# EAGLE board CommsTestBoardV2 (EAGLE 9.6.2)

Size 100 x 106.67 mm. Coordinates in mm from the lower left corner, seen from the top.
Outline: 0,0 100,0 100,106.67 0,106.67 0,0
Copper layers (1*16): Top 0.035mm / dielectric 1.5mm / Bottom 0.035mm
Design rules "default": minimum track width 6mil, minimum drill 0.35mm, track to track 6mil, track to pad 6mil, pad to pad 6mil, via to via 6mil, smd to smd 6mil, copper to edge 40mil, drill to drill 6mil, minimum pad ring 10mil, minimum via ring 8mil, stop-mask expansion 4mil, vias tented up to drill 0mil, thermal gap 10mil

## Footprints (pad centres in the part's own frame; a part is rotated, then mirrored left to right if it is on the bottom)
1985205 = drill 1 pad 1.5: 1 -2.75,-1.3; 2 0.75,3.7; 3 4.25,-1.3
LED-5MM = drill 0.813 octagon: A -1.27,0; K 1.27,0
3RP/1610N = drill 1.2 pad 2.184: 1 -5,0; 2 0,0; 3 5,0
OS102011MA1QN1 = drill 0.8 pad 1.3: 1 -2,0; 2 0,0; 3 2,0 | drill 1.5 pad 2.25: 4 -4.1,0; 5 4.1,0
PTS636SL50LFS = drill 1.2 pad 1.8: 1 0,0; 2 6.4,0
XBEE_PRO_S3B = drill 0.8 pad 1.4 square: 1 -11,8.75 | drill 0.8 pad 1.4: 2 -11,6.75; 3 -11,4.75; 4 -11,2.75; 5 -11,0.75; 6 -11,-1.25; 7 -11,-3.25; 8 -11,-5.25; 9 -11,-7.25; 10 -11,-9.25; 11 11,-9.25; 12 11,-7.25; 13 11,-5.25; 14 11,-3.25; 15 11,-1.25; 16 11,0.75; 17 11,2.75; 18 11,4.75; 19 11,6.75; 20 11,8.75
TEENSY_4.0_SIMPLE = drill 0.965: 0/RX -13.97,-7.62; 1/TX -11.43,-7.62; 2 -8.89,-7.62; 3/CANTX -6.35,-7.62; 3V3_LO -11.43,7.62; 4/CANRX -3.81,-7.62; 5 -1.27,-7.62; 6 1.27,-7.62; 7 3.81,-7.62; 8 6.35,-7.62; 9/CS 8.89,-7.62; 10/CS 11.43,-7.62; 11/MOSI 13.97,-7.62; 12/MISO 16.51,-7.62; 13/SCK 16.51,7.62; 14/A0 13.97,7.62; 15/A1 11.43,7.62; 16/A2 8.89,7.62; 17/A3 6.35,7.62; 18/A4/SDA 3.81,7.62; 19/A5/SCL 1.27,7.62; 20/A6 -1.27,7.62; 21/A7 -3.81,7.62; 22/A8 -6.35,7.62; 23/A9 -8.89,7.62; GND -16.51,-7.62; GND2 -13.97,7.62; VIN -16.51,7.62
TEENSY_4.1_SIMPLE = drill 0.965: 0/RX -25.4,-7.62; 1/TX -22.86,-7.62; 2 -20.32,-7.62; 3/CANTX -17.78,-7.62; 3V3_2 7.62,-7.62; 3V3_LO -22.86,7.62; 4/CANRX -15.24,-7.62; 5 -12.7,-7.62; 6 -10.16,-7.62; 7 -7.62,-7.62; 8 -5.08,-7.62; 9/CS -2.54,-7.62; 10/CS 0,-7.62; 11/MOSI 2.54,-7.62; 12/MISO 5.08,-7.62; 13/SCK 5.08,7.62; 14/A0 2.54,7.62; 15/A1 0,7.62; 16/A2 -2.54,7.62; 17/A3 -5.08,7.62; 18/A4/SDA -7.62,7.62; 19/A5/SCL -10.16,7.62; 20/A6 -12.7,7.62; 21/A7 -15.24,7.62; 22/A8 -17.78,7.62; 23/A9 -20.32,7.62; 24/A10 10.16,-7.62; 25/A11 12.7,-7.62; 26/A12 15.24,-7.62; 27/A13 17.78,-7.62; 28 20.32,-7.62; 29 22.86,-7.62; 30 25.4,-7.62; 31 27.94,-7.62; 32 30.48,-7.62; 33 30.48,7.62; 34 27.94,7.62; 35 25.4,7.62; 36 22.86,7.62; 37 20.32,7.62; 38/A14 17.78,7.62; 39/A15 15.24,7.62; 40/A16 12.7,7.62; 41/A17 10.16,7.62; GND -27.94,-7.62; GND2 -25.4,7.62; GND3 7.62,7.62; VIN -27.94,7.62
OLED_SSD1306 = drill 1.016 long: GND 0,-3.81; SCL 0,1.27; SDA 0,3.81; VCC 0,-1.27
43045-0400 = drill 1.02 square: P$1 1.5,4.32 | drill 1.02: P$2 -1.5,4.32; P$3 1.5,7.32; P$4 -1.5,7.32 | hole 3: 0,0
43650-0300 = drill 1.02 square: P$1 3,4.32 | drill 1.02: P$2 0,4.32; P$3 -3,4.32 | hole 3: 0,0
43045-0600 = drill 1.02 square: P$1 3,4.32 | drill 1.02: P$2 0,4.32; P$3 -3,4.32; P$4 3,7.32; P$5 0,7.32; P$6 -3,7.32 | hole 3: 0,0

## Placement (x,y rotation side)
J1  1985205  [1985205]  -58.42,83.82 0 top  (outside the outline)
J2  1985205  [1985205]  -73.66,83.82 0 top  (outside the outline)
LED1  [LED-5MM]  -46.99,99.06 0 top  (outside the outline)
LED2  [LED-5MM]  -59.69,99.06 0 top  (outside the outline)
R1  [3RP/1610N]  -21.59,49.53 0 top  (outside the outline)
R2  [3RP/1610N]  -39.37,49.53 0 top  (outside the outline)
S1  SWITCH_SLIDE_OS102011MS2QN1  [OS102011MA1QN1]  -27.94,111.76 0 top  (outside the outline)
S2  SWITCH_SLIDE_OS102011MS2QN1  [OS102011MA1QN1]  -59.69,111.76 0 top  (outside the outline)
S3  SWITCH_SLIDE_OS102011MS2QN1  [OS102011MA1QN1]  -27.94,118.11 0 top  (outside the outline)
S4  SWITCH_SLIDE_OS102011MS2QN1  [OS102011MA1QN1]  -59.69,118.11 0 top  (outside the outline)
S5  PTS636_SL50_LFS  [PTS636SL50LFS]  -74.93,99.06 0 top  (outside the outline)
S6  SWITCH_SLIDE_OS102011MS2QN1  [OS102011MA1QN1]  -27.94,124.46 0 top  (outside the outline)
S7  SWITCH_SLIDE_OS102011MS2QN1  [OS102011MA1QN1]  -59.69,124.46 0 top  (outside the outline)
U1  XBEE_PRO_S3B  [XBEE_PRO_S3B]  83.82,86.36 0 top
U2  XBEE_PRO_S3B  [XBEE_PRO_S3B]  54.61,86.36 0 top
U$1  TEENSY_4.0_SIMPLE  [TEENSY_4.0_SIMPLE]  82.55,34.29 180 top
U$3  TEENSY_4.1_SIMPLE  [TEENSY_4.1_SIMPLE]  68.58,55.88 0 top
U$4  OLED_SSD1306  [OLED_SSD1306]  -99.06,13.97 0 top  (outside the outline)
X1  [43045-0400]  -19.05,100.33 0 top  (outside the outline)
X2  [43650-0300]  -31.75,100.33 0 top  (outside the outline)
X3  [43045-0600]  -87.63,81.28 0 top  (outside the outline)

## Library data of the parts
J1 J2 = GTOR - Connectors; ARROW_PART_NUMBER: 1985205; ARROW_PRICE-STOCK: https://www.arrow.com/en/products/1985205/phoenix-contact; DESCRIPTION: Fixed Terminal Blocks PTSA 1.5/3-3.5-Z; HEIGHT: 13mm; MANUFACTURER_NAME: Phoenix Contact; MANUFACTURER_PART_NUMBER: 1985205; MOUSER_PART_NUMBER: 651-1985205; MOUSER_PRICE-STOCK: https://www.mouser.co.uk/ProductDetail/Phoenix-Contact/1985205?qs=JcjeNNoqGSNoFnucoMlHJQ%3D%3D
LED1 LED2 R1 R2 = GTOR - Passive Components
S1-S4 S6 S7 = GTOR - Active Components; ARROW_PART_NUMBER: OS102011MS2QN1; ARROW_PRICE-STOCK: https://www.arrow.com/en/products/os102011ms2qn1/ck; DESCRIPTION: Switch Slide Miniature SPDT 0.1A 12VDC Through Hole Slide Switch SPDT On-On 0.1 A@ 12 V dc Slide; HEIGHT: mm; MANUFACTURER_NAME: C & K COMPONENTS; MANUFACTURER_PART_NUMBER: OS102011MS2QN1; MOUSER_PART_NUMBER: 611-OS102011MS2QN1; MOUSER_PRICE-STOCK: https://www.mouser.co.uk/ProductDetail/CK/OS102011MS2QN1?qs=WtljUlYws5RvQ1hEv876nQ%3D%3D
S5 = GTOR - Active Components; ARROW_PART_NUMBER: PTS636 SL50 LFS; ARROW_PRICE-STOCK: https://www.arrow.com/en/products/pts636-sl50-lfs/ck; DESCRIPTION: Tactile Switches Tact 50mA 12VDC, 6.0x3.5, 5.0mm H, 130gf, THT leads, Black Actuator; HEIGHT: 5.2mm; MANUFACTURER_NAME: C & K COMPONENTS; MANUFACTURER_PART_NUMBER: PTS636 SL50 LFS; MOUSER_PART_NUMBER: 611-PTS636SL50LFS; MOUSER_PRICE-STOCK: https://www.mouser.co.uk/ProductDetail/CK/PTS636-SL50-LFS?qs=vLWxofP3U2xbACAJDYC1Hw%3D%3D
U1 U2 = GTOR - Microcontroller; DESCRIPTION: General ISM < 1GHz Transceiver Module 900MHz Antenna Not Included, RP-SMA Through Hole; DIGI-KEY_PART_NUMBER: 602-1293-ND; MF: Digi International; MP: XBP9B-XCST-001; PACKAGE: Module Digi International
U$1 U$3 = GTOR - Microcontroller
U$4 = GTOR - Breakout Boards
X1-X3 = GTOR - Microfit Connector

## Nets
3V3: J1.1 J2.1 R1.3 R2.3 U1.1 U$3.3V3_LO U$4.VCC X1.P$1 X2.P$1 X3.P$1
5V: U$1.VIN U$3.VIN
A1: U$3.17/A3 X2.P$2
C1: J1.2 U$1.14/A0
C2: J2.2 U$3.14/A0
CS: U$3.10/CS X3.P$5
DP: S5.1 U$3.2
GND: J1.3 J2.3 LED1.K LED2.K R1.1 R2.1 S5.2 U1.10 U2.1 U2.10 U$1.GND2 U$3.GND2 U$4.GND X1.P$4 X2.P$3 X3.P$6
LED1: LED1.A U$1.15/A1
LED2: LED2.A U$3.15/A1
MISO: U$3.12/MISO X3.P$3
MOSI: U$3.11/MOSI X3.P$2
P1: R1.2 U$1.16/A2
P2: R2.2 U$3.16/A2
R1: U$1.0/RX
RX1_4.0: S1.2
RX1_4.1: S2.2 U$3.0/RX
RX2.4.1: U$3.7
RX2_4.1: S4.2
RX5_4.0: S7.2 U$1.22/A8
RX_XBEE: S3.2 U1.3
RX_XBEE_SECONDARY: S6.2 U2.3
SCK: U$3.13/SCK X3.P$4
SCL: U$3.19/A5/SCL U$4.SCL X1.P$3
SDA: U$3.18/A4/SDA U$4.SDA X1.P$2
T1: U$1.1/TX
TX1_4.0: S2.1
TX1_4.1: S1.1 U$3.1/TX
TX2_4.1: S3.1 U$3.8
TX5_4.0: S6.1 U$1.21/A7
TX_XBEE: S4.1 U1.2
TX_XBEE_SECONDARY: S7.1 U2.2

## Tracks (layer width: path | path; a pad name or v marks a point on that pad's centre or on a via)
3V3  (9 unrouted)
5V  (1 unrouted)
A1  (1 unrouted)
C1  (1 unrouted)
C2  (1 unrouted)
CS  (1 unrouted)
DP  (1 unrouted)
GND  (15 unrouted)
LED1  (1 unrouted)
LED2  (1 unrouted)
MISO  (1 unrouted)
MOSI  (1 unrouted)
P1  (1 unrouted)
P2  (1 unrouted)
RX1_4.1  (1 unrouted)
RX5_4.0  (1 unrouted)
RX_XBEE  (1 unrouted)
RX_XBEE_SECONDARY  (1 unrouted)
SCK  (1 unrouted)
SCL  (2 unrouted)
SDA  (2 unrouted)
TX1_4.1  (1 unrouted)
TX2_4.1  (1 unrouted)
TX5_4.0  (1 unrouted)
TX_XBEE  (1 unrouted)
TX_XBEE_SECONDARY  (1 unrouted)